# Altium PCB ALTAIR_PD_Squad_V26.5a.PcbDoc (part 2 of 3)
Units mm, origin at the board's own origin, x right, y up, seen from the top; angles counter-clockwise.
Board outline 65 x 52 mm, 4 copper layers (Top Layer, Layer 2, Layer 3, Bottom Layer), stack 1.818 mm thick; 171 components, 122 nets, 540 pads, 371 vias.
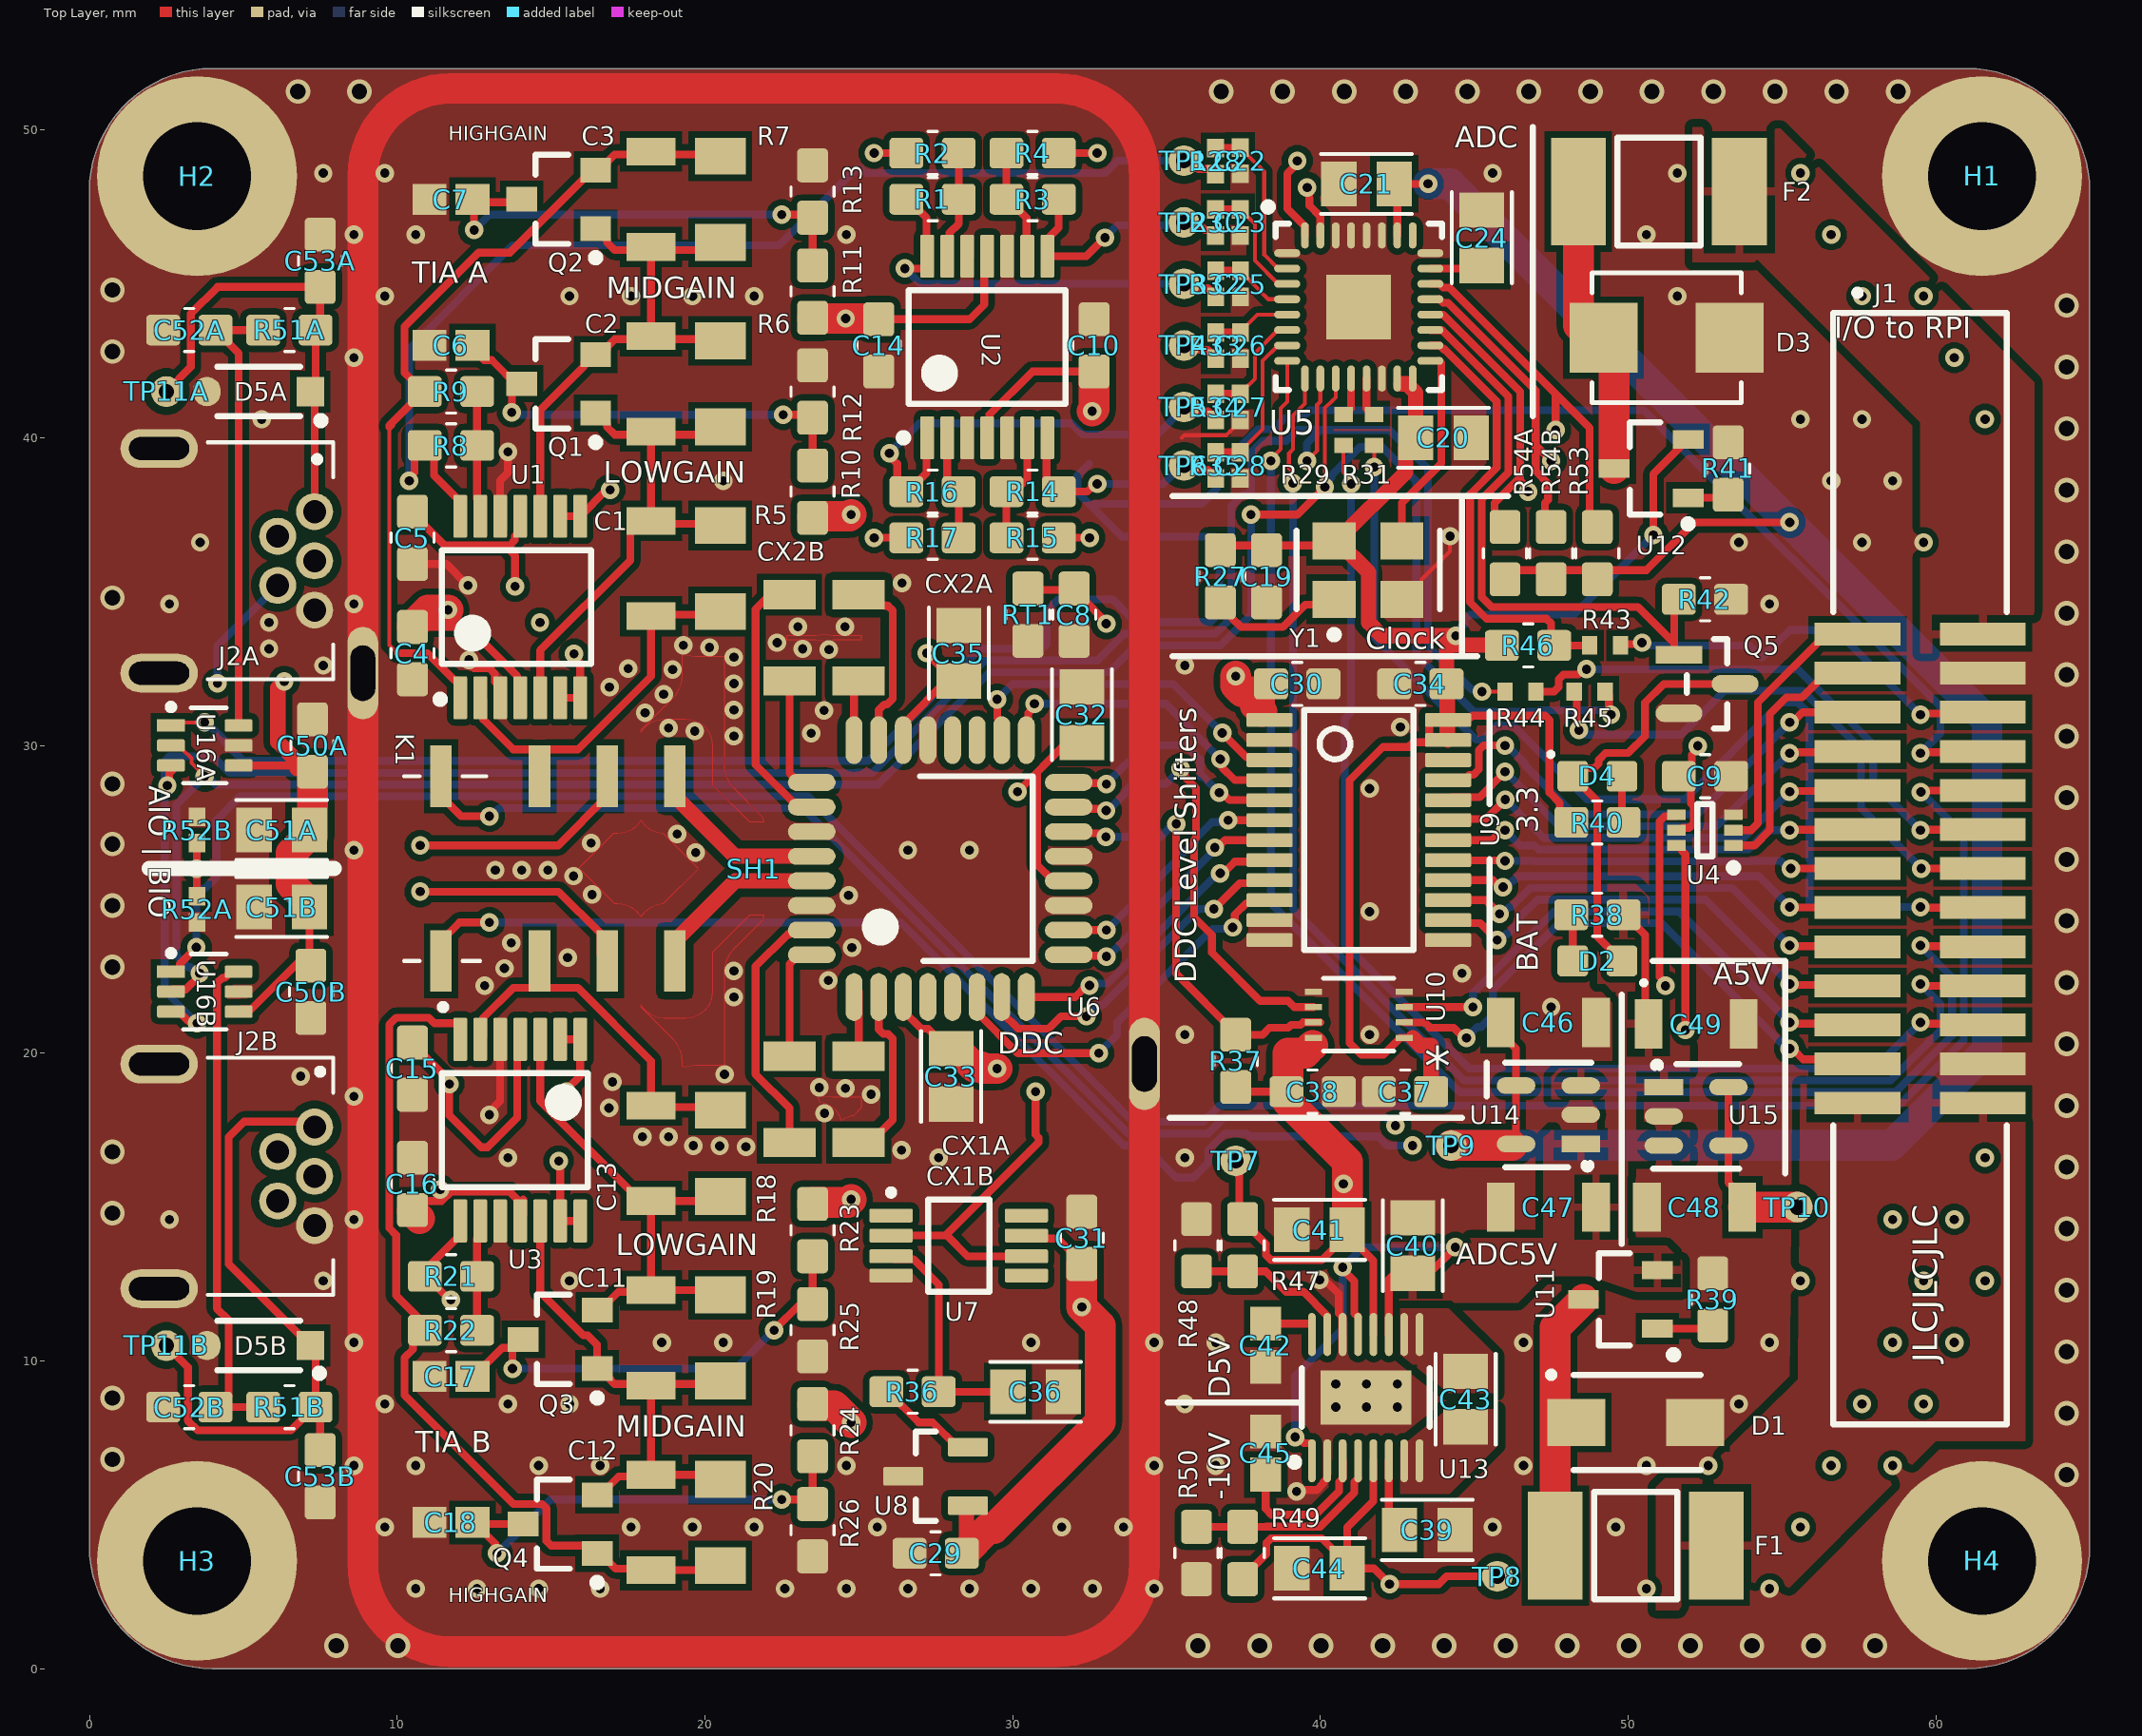
[diagram p0: Top Layer view]

## Via types
v1: diameter 0.6, hole 0.3, Top Layer to Bottom Layer, tented both sides, 305 vias
v2: diameter 0.8, hole 0.5, Top Layer to Bottom Layer, 59 vias
v3: diameter 0.6, hole 0.3, Top Layer to Bottom Layer, 7 vias

## Nets (pads, with @x,y where several pads share a name; then routed paths per layer and width w, separated by ;. In a path a pad name is that pad's centre, name@x,y a point inside that pad or via, vN(x,y) a via of type N, cw(c..) or ccw(c..) an arc to the next point about the centre after c; other vN are vias at no path point) (continued)
AVDD: (continued)
  Top Layer w0.254: U16B.4@4.85,21.35 4.923,21.423 5.253,21.423 7.15,23.32 C51B.2@7.15,24.75 ; U16A.4@4.85,29.35 6.564,29.35 ; C15.2@10.5,20.35 10.5,20.3 11.631,19.169 11.631,19.065 v1(11.697,18.999) 11.697,17.982 12.734,16.945 12.945,16.945 13.902,17.902 13.902,20.352 U3.4@14,20.45 ; C4.2@10.5,33.85 12.305,33.85 13.902,32.253 13.902,31.648 U1.4@14,31.55 ; U6.3@26.447,21.825 26.447,21.377 27.028,20.796 27.253,20.796 27.402,20.647 27.402,20.598 27.85,20.15 C33.1@28,20.15 ; U2.4@29.15,40.05 29.248,40.148 29.248,40.753 30.645,42.15 C10.2@32.65,42.15 ; U7.7@30.45,14.075 30.548,13.977 31.473,13.977 32.25,13.2 C31.2@32.25,13.15 ; U15.5@53.26,18.9 53.26,15.799 53.75,15.31 C48.1@53.75,15
  Top Layer w0.5: v1@6.123,31.873 6.123,30.114 6.75,29.487 6.75,29.25 ; C29.2@28.5,4.045 28.5,5.25 U8.1@28.55,5.3
  Top Layer w1: C51B.2@7.15,24.75 7.075,24.825 7.075,24.975 6.552,25.498 6.552,25.948 v1(6.5,26) 6.552,26.052 6.552,26.502 7.105,27.055 C51A.2@7.225,27.055 ; C51A.2@7.25,27.055 C50A.2@7.25,29.15 C50A.2@7.25,29.2 ; C4.2@10.5,33.85 10.5,33.9 11.007,34.407 v1(11.657,34.407) ; C33.1@28,20.15 28.15,20.15 28.748,19.552 28.985,19.552 29.037,19.5 v1(29.5,19.5) ; C29.2@28.35,3.75 28.4,3.75 29.207,4.557 29.394,4.557 32.852,8.015 32.852,11.148 v1(32.25,11.75) C31.2@32.25,13.15 ; v1(32.585,40.862) 32.65,40.927 C10.2@32.65,42.15 ; C48.1@53.75,15 TP10.1@55.5,15
  other v1: 6.332,32.082
AVDD_ADC: C21.2 C46.1 R53.1 R54A.1 R54B.1 TP9.1 U5.26 U14.4 U14.5 | length 74
  Top Layer w0.254: C21.2@42.4,48.25 v1(43.5,48.25) ; U5.26@42.5,46.575 C21.2@42.5,48.25 ; R54A.1@45.75,35.5 45.948,35.698 50.596,35.698 52.148,37.25 v1(55.25,37.25) ; C46.1@45.86,21 45.86,20.65 46.36,20.15 U14.4@46.36,18.95 U14.5@46.36,17.05
  Top Layer w1: TP9.1@44.25,17 U14.5@46.232,17
  Bottom Layer w1: v1(43.5,48.25) 44.231,48.25 v1@55.25,37.231 ; TP9.1@44.25,17 58.559,17 61.663,20.104 61.663,30.818 v1@55.25,37.231 ; v1(55.25,37.25) v1@55.25,37.231
AVSS: C5.2 C14.2 C16.2 C44.2 R10.2 R11.2 R23.2 R24.2 R49.2 TP8.1 U1.11 U2.11 U3.11 U13.5 | length 57.3
  Top Layer w0.254: C16.2@10.5,14.9 10.798,15.198 11.443,15.198 11.749,15.504 13.651,15.504 13.902,15.253 13.902,14.848 U3.11@14,14.75 ; C5.2@10.5,37.6 10.5,37.55 11.554,36.496 13.5,36.496 ; v1(13.834,35.166) 13.834,36.162 13.5,36.496 ; U1.11@14,37.45 14,36.975 13.829,36.804 13.829,36.674 13.651,36.496 13.5,36.496 ; U3.11@14.098,14.75 14.098,15.253 ; C14.2@25.65,43.85 28.6,43.85 29.079,44.329 U2.11@29.079,45.852 ; R49.2@37.475,2.909 37.475,2.959 38.246,3.73 38.246,4.089 38.395,4.238 40.046,4.238 40.875,3.409 40.875,4.597 41.725,5.447 U13.5@41.725,6.759 ; C44.2@40.875,3.259 41.741,3.259 v1(42.25,2.75) 43.854,2.75 44.104,3 TP8.1@45.75,3
  Top Layer w1: C16.2@10.5,14.9 10.5,14.85 C16.2@10.722,14.628 ; R24.2@23.5,8.6 23.5,8.55 24.2,8.55 v1(24.75,8) ; R23.2@23.5,15.05 23.5,15.15 24.65,15.15 v1(24.75,15.25) ; R10.2@23.5,37.4 23.5,37.45 24.7,37.45 v1(24.75,37.5) ; R11.2@23.5,43.9 23.5,43.874 v1(24.576,43.874) 25.65,43.874 C14.2@25.65,43.85
  Layer 3 w1: v1(11.398,15.569) 10.504,16.463 10.504,24.23 11.172,24.23 11.926,24.984 11.926,28.068 12.044,28.187 12.044,29.544 14.645,32.145 v1(14.645,33.996)
BRD_TMP_ADCIN: C8.2 R53.2 RT1.2 U5.22 | length 34.1
  Top Layer w0.254: RT1.2@30.25,35.25 30.448,35.052 C8.2@31.948,35.052 ; C8.2@32.198,34.802 32.248,34.802 33.043,34.007 v1(33.043,33.957) ; U5.22@43.575,45 43.871,45 43.992,44.879 44.187,44.879 47.647,41.419 ; v1(47.647,40.25) 47.647,41.419 ; R53.2@49,37.1 48.75,37.35 48.75,40.316 47.647,41.419
  Layer 3 w0.254: v1@33,34 43.918,34 44.287,34.369 44.908,34.369 48.147,37.608 48.147,39.75 v1(47.647,40.25)
D5V: C9.2 C30.1 C32.1 C38.1 C41.2 R37.2 R47.2 TP7.1 U4.5 U6.12 U9.1 U10.8 U13.12 | length 76.4
  Top Layer w0.254: v1(30.16,28.495) 31.764,30.1 C32.1@32.25,30.1 ; 30.793,29.043 30.793,26.129 31.322,25.6 U6.12@31.822,25.6 ; TP7.1@37.25,16.5 37.362,16.388 37.362,14.721 R47.2@37.475,14.609 ; R37.2@37.25,18.9 37.4,18.75 C38.1@38.9,18.75 ; R47.2@37.475,14.559 38.229,13.805 38.229,13.446 38.395,13.28 40.046,13.28 40.875,14.109 41.725,13.259 U13.12@41.725,10.859 ; U9.1@38.4,30.875 C30.1@38.4,32 ; U4.5@51.575,27.25 51.7,27.25 51.771,27.321 51.98,27.321 52.129,27.47 52.129,28.03 52.04,28.119 52.04,28.627 C9.2@51.667,29 ; C9.2@51.65,29 51.7,29 52.073,29.373 52.073,29.703 52.263,29.893 v1(52.263,29.987)
  Top Layer w1: v1(37.25,32.25) 37.25,31.95 37.462,31.738 37.887,31.738 37.887,31.313 38.1,31.1 ; 39.75,20.25 39.5,20 38.95,20 38.95,18.409 40.875,16.484 C41.2@40.875,14.259
  Layer 3 w0.5: 38.75,23.25 38.87,23.37 44.941,23.37 45.402,22.909 46.062,22.909 49.153,26 49.153,26.877 v1(52.263,29.987)
  Layer 3 w1: v1(30.16,28.495) 33.092,31.428 36.428,31.428 v1(37.25,32.25) 39,30.5 39,17.5 v1(40.75,15.75)
DDC_CLK: J1.15 U9.16 | length 14
  Top Layer w0.254: U9.16@44.15,25.625 45.616,25.625 45.843,25.398 v1(45.937,25.398) ; v1(55.25,24.75) 55.26,24.74 57.455,24.74 J1.15@57.465,24.73
  Bottom Layer w0.254: v1(45.937,25.398) 46.03,25.398 46.235,25.603 46.268,25.603 46.415,25.75 54.25,25.75 v1(55.25,24.75)
DDC_CONV: J1.17 U9.15 | length 14.6
  Top Layer w0.254: U9.15@44.15,24.975 45.378,24.975 v1(45.824,24.529) ; v1(55.25,23.5) 55.27,23.48 57.445,23.48 J1.17@57.465,23.46
  Bottom Layer w0.254: v1(45.824,24.529) 45.918,24.529 46.14,24.751 46.205,24.751 46.822,25.369 53.381,25.369 v1(55.25,23.5)
DDC_DCLK: J1.13 U9.17 | length 13.4
  Top Layer w0.254: U9.17@44.15,26.275 44.162,26.263 45.988,26.263 v1(46,26.25) ; v1(55.287,26) J1.13@57.465,26
  Bottom Layer w0.254: v1(46,26.25) 46.922,26.25 46.934,26.238 54.066,26.238 54.078,26.25 54.965,26.25 55.215,26 v1(55.287,26)
DDC_DOUT: J1.23 U10.2 | length 18.9
  Top Layer w0.254: U10.2@42.722,21 43.396,21 43.556,20.84 ; 43.548,20.827 44.329,20.827 44.656,20.5 v1(44.75,20.5) ; v1(55.25,20.146) 55.344,20.146 55.689,19.801 57.314,19.801 J1.23@57.465,19.65
  Bottom Layer w0.254: v1(44.75,20.5) 45.103,20.853 45.226,20.853 45.605,21.232 45.605,22.066 47.765,24.226 51.076,24.226 55.156,20.146 v1(55.25,20.146)
DDC_DVALID: J1.21 U10.3 | length 17.8
  Top Layer w0.254: U10.3@42.722,21.5 43.75,21.5 ; 43.75,21.502 44.275,21.502 44.277,21.5 v1(44.958,21.5) ; v1(55.25,21) 55.29,20.96 57.425,20.96 J1.21@57.465,20.92
  Bottom Layer w0.254: v1(44.958,21.5) 44.958,21.958 47.607,24.607 51.643,24.607 v1(55.25,21)
DDC_DXMIT: J1.11 U9.18 | length 14
  Top Layer w0.254: U9.18@44.15,26.925 45.581,26.925 45.906,27.25 v1(46,27.25) ; v1(55.25,27.25) 55.26,27.26 57.455,27.26 J1.11@57.465,27.27
  Bottom Layer w0.254: v1(46,27.25) 46.5,26.75 46.961,26.75 47.092,26.619 53.908,26.619 54.539,27.25 v1(55.25,27.25)
DDC_RANGE0: J1.09 U9.19 | length 14.7
  Top Layer w0.254: U9.19@44.15,27.575 44.181,27.606 45.375,27.606 v1(46.009,28.241) ; v1(55.25,28.5) 55.27,28.52 57.445,28.52 J1.09@57.465,28.54
  Bottom Layer w0.254: v1(46.009,28.241) 47.25,27 53.75,27 v1(55.25,28.5)
DDC_RANGE1: J1.07 U9.20 | length 15.4
  Top Layer w0.254: U9.20@44.15,28.225 44.248,28.323 45.177,28.323 v1(46,29.146) ; v1(55.25,29.75) 55.28,29.78 57.435,29.78 J1.07@57.465,29.81
  Bottom Layer w0.254: v1(46,29.146) 46.019,29.146 46.656,28.508 46.656,28.49 47.765,27.381 52.881,27.381 v1(55.25,29.75)
DDC_RANGE2: J1.05 U9.21 | length 16.5
  Top Layer w0.254: U9.21@44.166,28.859 44.659,28.859 44.846,29.046 44.976,29.046 45.154,29.224 45.154,29.847 45.307,30 v1(46,30) ; v1(55.25,30.75) 55.344,30.75 55.674,31.08 J1.05@57.465,31.08
  Bottom Layer w0.254: v1(46,30) 46.061,30 46.647,29.414 46.647,29.353 48.238,27.762 52.262,27.762 v1(55.25,30.75)
DDC_TEST: J1.19 U9.14 | length 15.4
  Top Layer w0.254: U9.14@44.15,24.325 44.248,24.227 45.195,24.227 v1(45.743,23.679) ; v1(55.25,22.25) 55.28,22.22 57.435,22.22 J1.19@57.465,22.19
  Bottom Layer w0.254: v1(45.743,23.679) 45.837,23.679 46.04,23.882 46.092,23.882 46.471,24.261 46.471,24.406 47.053,24.988 52.512,24.988 v1(55.25,22.25)
DRDY_CHA: R31.1 U5.13 | length 1.3
  Top Layer w0.254: U5.13@41.5,41.925 41.5,40.95 41.7,40.75 R31.1@41.75,40.75
GUARDA: J2A.4 J2B.4 R52A.1 R52B.1 | length 24.8
  Top Layer w0.254: R52A.1@3.5,25.1 3.494,25.106 3.494,25.994 v1(3.488,26) 3.494,26.006 3.494,26.819 R52B.1@3.5,26.825
  Layer 3 w0.254: v1(4.165,32.016) 4.165,31.25 4.397,31.018 4.397,26.909 v1(3.488,26) 2.774,25.286 2.774,22.489 3.315,21.948 3.441,21.948 4.678,20.71 4.678,16.64 J2B.4@6.118,15.2
  Bottom Layer w0.254: v1(4.165,32.016) 4.165,33.246 J2A.4@6.118,35.2
LEDCONTROL_GPIO: Q5.1 R42.2 U5.19 | length 18.9
  Top Layer w0.254: U5.19@43.575,43.5 43.95,43.5 46.11,41.34 46.11,38.873 45.246,38.008 45.246,34.818 45.564,34.5 50.319,34.5 51.5,33.319 ; Q5.1@51.5,33.11 51.5,33.319 ; R42.2@51.65,34.75 51.5,34.6 51.5,33.319
NetC1_1: C1.1 C2.2 Q1.1 R5.2 R6.1 U1.5 | length 17.1
  Top Layer w0.254: U1.5@14.65,31.55 14.65,33.086 17.577,36.013 17.577,36.977 17.9,37.3 C1.1@18.25,37.3 C2.2@18.25,40.2 ; Q1.1@16.45,40.7 16.55,40.7 16.823,40.427 16.823,40.346 17.069,40.1 20.35,40.1 R6.1@20.5,40.25 ; C1.1@18.25,37.2 20.35,37.2 R5.2@20.5,37.05

## Text inside footprints (layer, text, board x,y; h text height)
D3: Mechanical 13 "RefDes2" at 49.027,42.615 h1.27
J2A: Mechanical 13 "PCB EDGE" at 0.518,31.25 h1.02 r270
J2B: Mechanical 13 "PCB EDGE" at 0.518,11.25 h1.02 r270
U10: Top Overlay "*" at 44.25,20.75 h1.27 r180; Mechanical 13 "*" at 42.38,21.542 h1.27 r180